# Altium PCB sense_patch.PcbDoc
Units mm, origin at the board's own origin, x right, y up, seen from the top; angles counter-clockwise.
Board outline 23.2 x 22.2 mm, 2 copper layers (Top Layer, Bottom Layer); 21 components, 15 nets, 83 pads, 145 vias.
Unrouted connection lines stored in the file: 17.
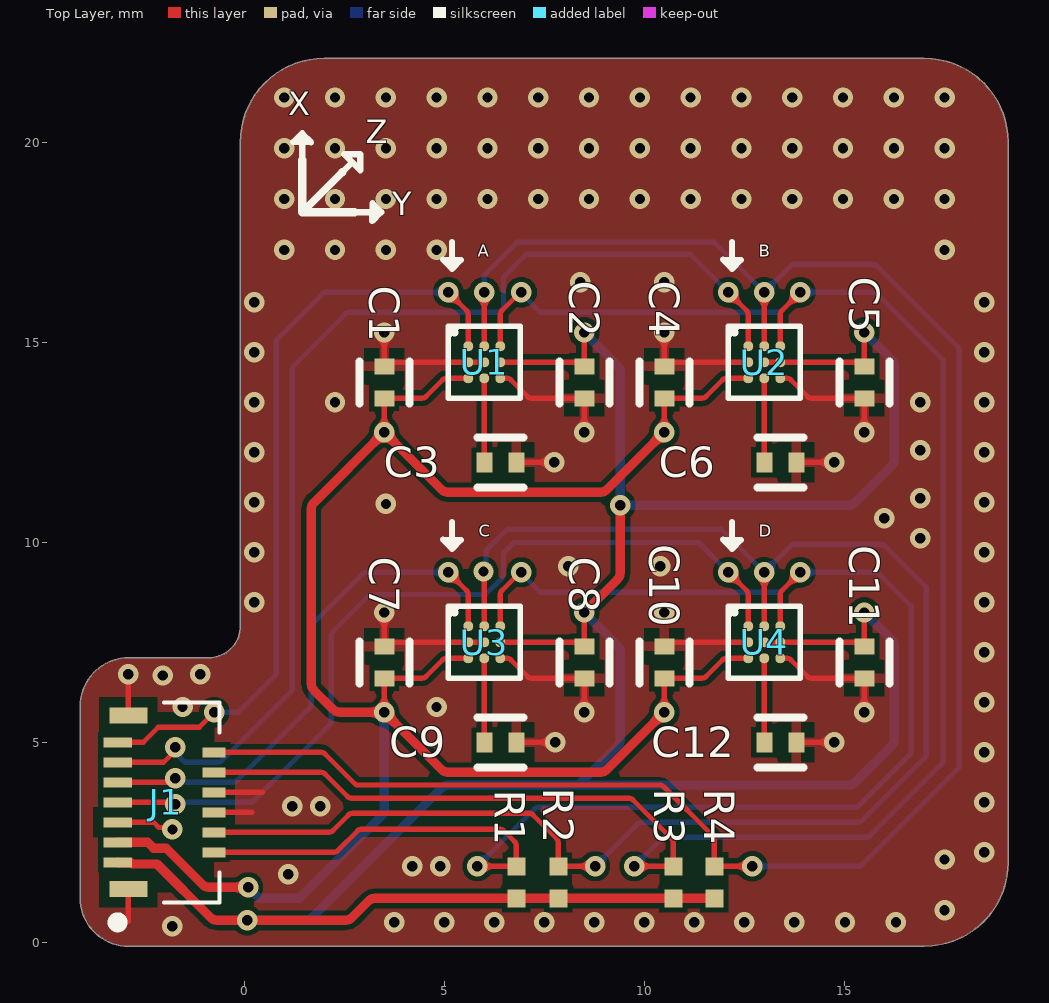
[diagram p0: Top Layer view]
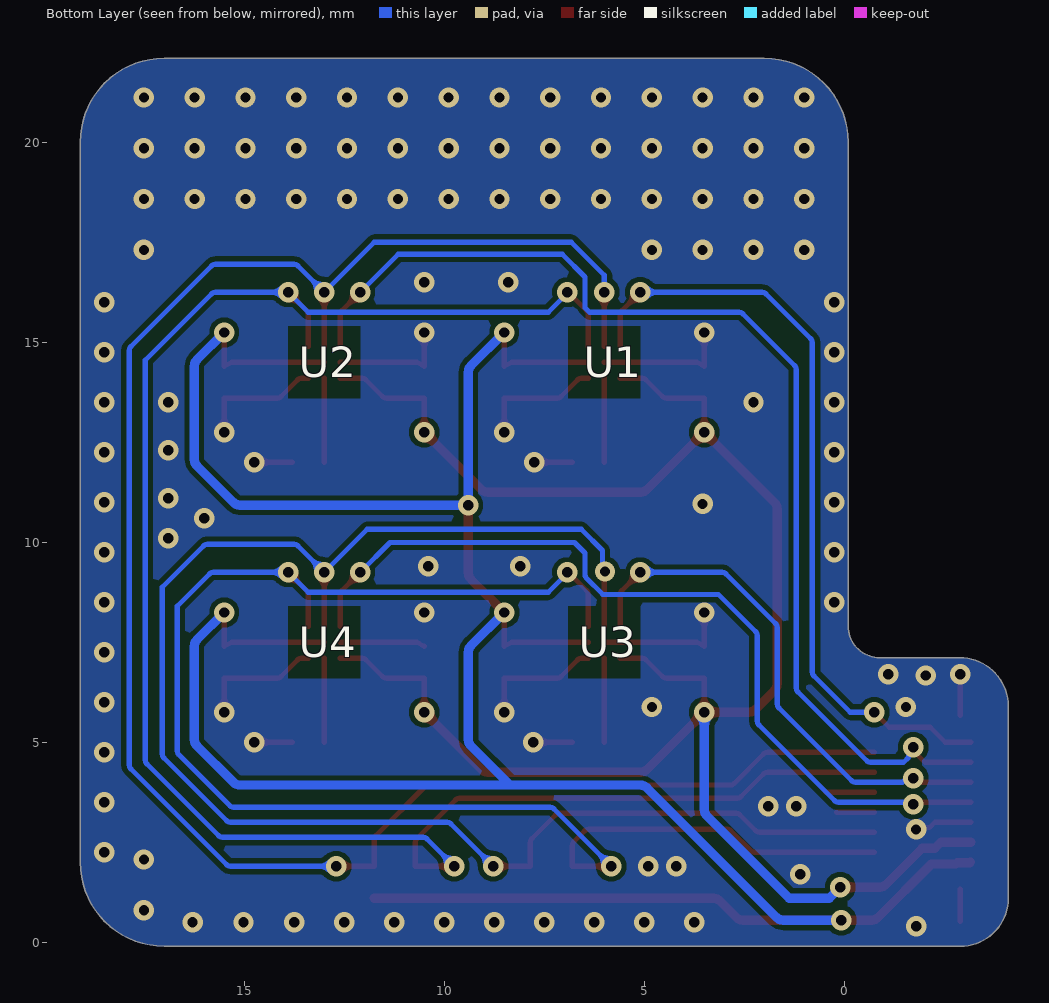
[diagram p1: Bottom Layer view, seen from below]
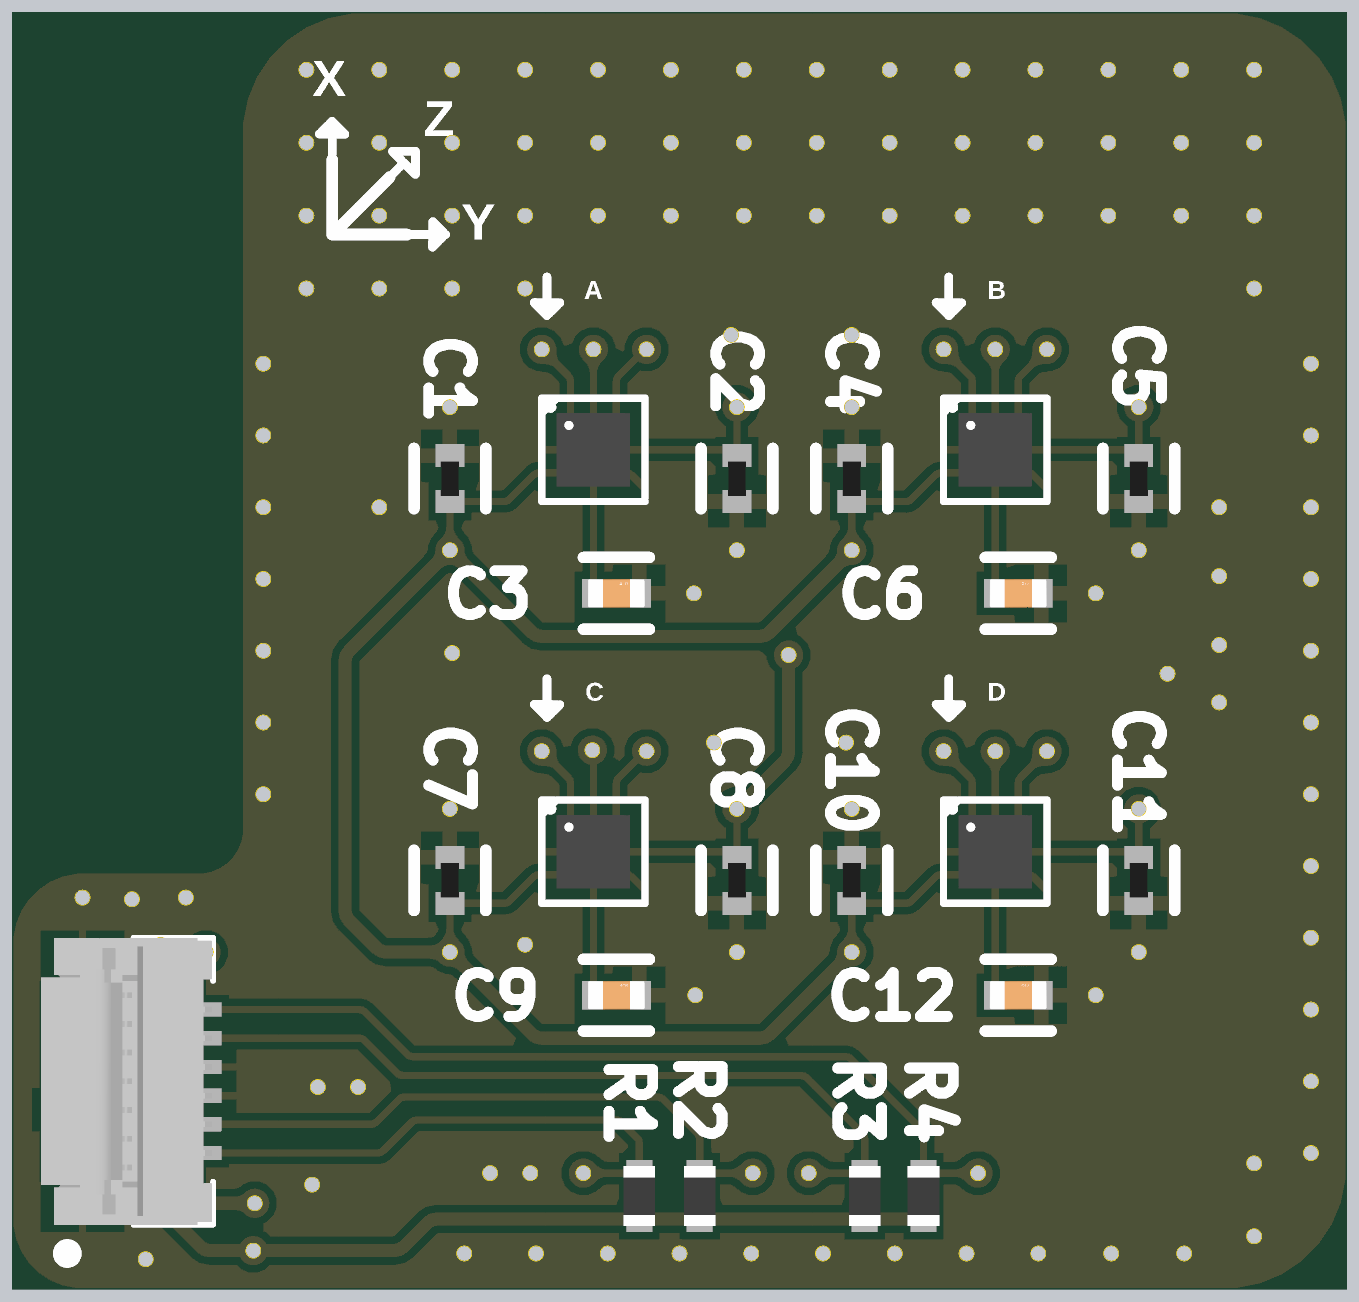
[diagram p2: 3D render of the assembled board from above, using the file's embedded part models]

## Layer stack, top to bottom
Top Solder: solder mask 0.0102, Solder Resist, Dk 3.5
Top Layer: signal copper 0.0356
Dielectric 1: dielectric 0.32, FR-4, Dk 4.8
Bottom Layer: signal copper 0.0356
Bottom Solder: solder mask 0.0102, Solder Resist, Dk 3.5

## Board outline
-2.9,-0.1 17,-0.1 17.001,-0.1 ccw(c17,2) 19.1,1.999 19.1,2 19.1,20 19.1,20.002 ccw(c17,20) 17.001,22.1 17,22.1 2,22.1 1.998,22.1 ccw(c2,20) -0.1,20 -0.1,7.9 cw(c-0.884,7.9) -0.884,7.116 -2.884,7.116 ccw(c-2.884,5.9) -4.1,5.9 -4.1,1.1 ccw(c-2.9,1.1)

## Design rules (kind name [scope] priority, off if disabled: settings)
Clearance [All] p1: gap=0.127 ignorepadtopadclearanceinfootprint=FALSE
PolygonConnect [All] p1: thpad.connectstyle=Relief thpad.reliefconductorwidth=0.254 thpad.reliefentries=4 thpad.polygonreliefangle="90 Angle" thpad.airgapwidth=0.254 smdpad.connectstyle=Relief smdpad.reliefconductorwidth=0.254 smdpad.reliefentries=4 smdpad.polygonreliefangle="90 Angle" smdpad.airgapwidth=0.254 via.connectstyle=Direct via.reliefconductorwidth=0.254 via.reliefentries=4 via.polygonreliefangle="90 Angle" via.airgapwidth=0.254
RoutingVias [All] p1: holewidth=0.254 width=1.27 viastyle="Through Hole" minholewidth=0.254 minwidth=0.508 maxholewidth=0.711 maxwidth=1.27
SolderMaskExpansion [IsVia] p1: expansion=0.102 istentingtop=TRUE
Width [All] p1: maxlimit=0.635 minlimit=0.102 preferedwidth=0.178
30 further rules are at their usual default settings.

## Classes and differential pairs
component class SENSE: C1 C2 C3 C4 C5 C6 C7 C8 C9 C10 C11 C12 U1 U2 U3 U4
component class CONNECTOR: J1 R1 R2 R3 R4

## Components (designator, comment, footprint, x,y, rotation, side; value= is the part's Value field where it differs from the comment)
C1 "0.1uF" FP-GRM15-MFG 3.5,14 r270 top value=0.10μF
C2 "0.1uF" FP-GRM15-MFG 8.5,14 r90 top value=0.10μF
C3 "2.2uF" FP-C1005-050-0_15-0_1-MFG 6.4,12 r0 top
C4 "0.1uF" FP-GRM15-MFG 10.5,14 r270 top value=0.10μF
C5 "0.1uF" FP-GRM15-MFG 15.5,14 r90 top value=0.10μF
C6 "2.2uF" FP-C1005-050-0_15-0_1-MFG 13.4,12 r0 top
C7 "0.1uF" FP-GRM15-MFG 3.5,7 r270 top value=0.10μF
C8 "0.1uF" FP-GRM15-MFG 8.5,7 r90 top value=0.10μF
C9 "2.2uF" FP-C1005-050-0_15-0_1-MFG 6.4,5 r0 top
C10 "0.1uF" FP-GRM15-MFG 10.5,7 r270 top value=0.10μF
C11 "0.1uF" FP-GRM15-MFG 15.5,7 r90 top value=0.10μF
C12 "2.2uF" FP-C1005-050-0_15-0_1-MFG 13.4,5 r0 top
J1 "502078-1362" 5020781362 -2,3.5 r270 top
R1 "4.7K" RESC1005X40X25LL05T05 6.8,1.5 r270 top
R2 "4.7K" RESC1005X40X25LL05T05 7.85,1.5 r270 top
R3 "4.7K" RESC1005X40X25LL05T05 10.725,1.5 r270 top
R4 "4.7K" RESC1005X40X25LL05T05 11.75,1.5 r270 top
U1 "BMM350" BMM350 6,14.5 r0 top
U2 "BMM350" BMM350 13,14.5 r0 top
U3 "BMM350" BMM350 6,7.5 r0 top
U4 "BMM350" BMM350 13,7.5 r0 top

## Footprints (in the part's own frame and the unit in brackets; to place one, negate y for a bottom-side part, rotate by r counter-clockwise, add the part's x,y. Pads: shape width x height; smd on the part's side, far side on the other; paste and mask are expansions set on the pad)
5020781362 [mm]
  rect 0.25x0.72 smd: 1(1.5,-1.165) 3(1,-1.165) 5(0.5,-1.165) 7(0,-1.165) 9(-0.5,-1.165) 11(-1,-1.165) 13(-1.5,-1.165)
  rect 0.25x0.57 smd: 2(1.25,1.24) 4(0.75,1.24) 6(0.25,1.24) 8(-0.25,1.24) 10(-0.75,1.24) 12(-1.25,1.24)
  rect 0.4x0.95 smd: MP1(2.17,-0.9) MP2(-2.17,-0.9)
  silkscreen extent -2.5,-1.21 3.05,1.38, body extent -2.5,-1.63 2.5,1.36, height 1
BMM350 [mm] "BGA, 9-Leads, Body 1.28x1.28mmx0.50mm, Pitch 0.40mm"
  round 0.25 smd mask+0.05: A1(-0.4,0.4) A2(0,0.4) A3(0.4,0.4) B1(-0.4,0) B2(0,0) B3(0.4,0) C1(-0.4,-0.4) C2(0,-0.4) C3(0.4,-0.4)
  silkscreen extent -0.79,0.7 -0.69,0.79, body extent -0.64,-0.64 0.64,0.64, height 0.5
FP-C1005-050-0_15-0_1-MFG [mm]
  rect 0.4x0.5 smd paste+0 mask+0: 1(-0.4,0) 2(0.4,0)
  silkscreen extent -0.58,-0.63 0.58,0.63, body extent -0.7,-0.4 0.7,0.4, height 0.25
FP-GRM15-MFG [mm]
  rect 0.4x0.5 smd paste+0 mask+0: 1(-0.4,0) 2(0.4,0)
  silkscreen extent -0.53,-0.63 0.53,0.63, body extent -0.7,-0.38 0.7,0.38, height 0.25
RESC1005X40X25LL05T05 [mm] "Chip Resistor, 2-Leads, Body 1.05x0.55mm, IPC High Density"
  rect 0.45x0.45 smd: 1(-0.4,0) 2(0.4,0)
  body extent -0.53,-0.28 0.53,0.28, height 0.4

## Part data
C1 C2 C4 C5 C7 C8 C10 C11: library part CMP-2100-03641-2, "CAP CER 0.1UF 16V X7R 0402", Capacitance=0.10μF, Manufacturer=Murata, Manufacturer Part Number=GRM155R71C104KA88D, Package=GRM15, Temperature="-55°C to +125°C", Temperature Characteristic=X7R, Temperature Range High=+125°C, Temperature Range Low=-55°C, Tolerance=10%, Voltage Rating=16Vdc, Category=Cap, ComponentLink2Description=Datasheet, ComponentLink2URL=https://search.murata.co.jp/Ceramy/image/img/A01X/G101/ENG/GRM155R71H471KA01-01A.pdf, Device Class L1="Passive Components", Device Class L2=Capacitors, Device Class L3="Ceramic Capacitors", Digikey Description="CAP CER 0.1UF 16V X7R 0402", Height=0.55mm, Ipc Land Pattern Name=CAPC10050X219, Lead Free=yes, Material=Ceramic, Mouser Description="0402 0.1 uF 16V ±10 % Tolerance X7R SMT Multilayer Ceramic Capacitor", Octopart=https://octopart.com/grm155r71c104ka88d-murata-196880, RoHS=TRUE, Standoff Height=0mm
C3 C6 C9 C12: library part CMP-08246-004344-1, "CAP CER 2.2UF 10V X7S 0402", Case Code (Imperial)=0402, Case Code (Metric)=1005, Dielectric=X7S, Dielectric Material=Ceramic, Max Operating Temperature=125°C, Min Operating Temperature=-55°C, Package Quantity=1, Tolerance=10%, Voltage Rating=10V, Capacitance=2.2uF, Case/Package=0402, Depth=0.5mm, Height=0.5mm, Lead Free="Lead Free", Length=1mm, Mount="Surface Mount", Packaging="Tape and Reel", Resistor Type=Ceramic, RoHS Compliant=Yes, Series=C, Termination=SMD/SMT, Thickness=0.022inch, Voltage Rating (DC)=10V, Weight=2.3E-05oz, Width=0.02inch
J1: "Connector", Manufacturer_Name=Molex, Mouser Part Number=538-502078-1362, Datasheet Link=https://www.molex.com/pdm_docs/sd/5020781362_sd.pdf, Height=1.7mm, Manufacturer_Part_Number=502078-1362, Mouser Price/Stock=https://www.mouser.co.uk/ProductDetail/Molex/502078-1362?qs=GBLSl2Akirt8csfPYHMErA%3D%3D
R1 R2 R3 R4: library part CMP-2002-01154-4, "Chip Resistor, 4.7 KOhm, +/- 1%, 0.1 W, -55 to 155 degC, 0402 (1005 Metric), RoHS, Tape and Reel", Case Code (Imperial)=0402, Case Code (Metric)=1005, Max Operating Temperature="155 degC", Min Operating Temperature="-55 degC", Package Quantity=1, PartNumber=ERJ-2RKF4701X, Power Rating="100 mW", Resistance="4.7 KOhm", Tolerance=1%, Voltage Rating="50 V", Case\/Package=0402, ComponentLink1Description="Manufacturer URL", ComponentLink1URL=http://www.panasonic.com/, ComponentLink2Description=Datasheet, ComponentLink2URL=http://industrial.panasonic.com/cdbs/www-data/pdf/RDA0000/AOA0000C86.pdf, DatasheetVersion=04/2015, Height="0.35 mm", Length="1 mm", Mount="Surface Mount", Mounting Technology="Surface Mount", PackageDescription="2-Pin Surface Mount Device, Body 1 x 0.5 mm", PackageReference=0402, Packaging="Cut Tape", Pins=2, Radiation Hardening=No, REACH SVHC=Yes, RoHSCompliant=true, Width="0.5 mm"

## Via types
v1: diameter 0.508, hole 0.254, Top Layer to Bottom Layer, tented both sides, 144 vias
v2: diameter 0.508, hole 0.254, Top Layer to Bottom Layer, 1 vias

## Nets (pads, with @x,y where several pads share a name; then routed paths per layer and width w, separated by ;. In a path a pad name is that pad's centre, name@x,y a point inside that pad or via, vN(x,y) a via of type N, cw(c..) or ccw(c..) an arc to the next point about the centre after c; other vN are vias at no path point)
1V8: C1.2 C4.2 C7.2 C10.2 J1.3 U1.C1 U2.C1 U3.C1 U4.C1 | length 48.8
  Top Layer w0.127: v1(3.5,5.75) C7.2 4.447,6.6 ccw(c4.447,6.727) 4.537,6.637 4.963,7.063 cw(c5.053,6.973) 5.053,7.1 U3.C1 ; v1(3.5,12.75) C1.2 4.447,13.6 ccw(c4.447,13.727) 4.537,13.637 4.963,14.063 cw(c5.053,13.973) 5.053,14.1 U1.C1 ; v1(10.5,5.75) C10.2 11.447,6.6 ccw(c11.447,6.727) 11.537,6.637 11.963,7.063 cw(c12.053,6.973) 12.053,7.1 U4.C1 ; v1(10.5,12.75) C4.2 11.447,13.6 ccw(c11.447,13.727) 11.537,13.637 11.963,14.063 cw(c12.053,13.973) 12.053,14.1 U2.C1
  Top Layer w0.229: J1.3 -2.415,2.5 -2.265,2.35 -1.95,2.35 -1.042,1.442 ccw(c-0.88,1.604) -0.88,1.375 v1(0.1,1.375) ; v1(10.5,5.75) 9.067,4.317 cw(c8.905,4.479) 8.905,4.25 5.095,4.25 cw(c5.095,4.479) 4.933,4.317 v1(3.5,5.75) 2.391,5.75 cw(c2.391,5.979) 2.23,5.817 1.742,6.305 cw(c1.904,6.466) 1.675,6.466 1.675,10.83 cw(c1.904,10.83) 1.742,10.992 v1(3.5,12.75) 4.933,11.317 ccw(c5.095,11.479) 5.095,11.25 8.905,11.25 ccw(c8.905,11.479) 9.067,11.317 v1(10.5,12.75)
  Bottom Layer w0.229: v1(0.1,1.375) 0.375,1.1 1.375,1.1 3.433,3.158 ccw(c3.271,3.32) 3.5,3.32 v1(3.5,5.75)
3V3: C2.2 C5.2 C8.2 C11.2 J1.1 R1.2 R2.2 R3.2 R4.2 U1.B3 U2.B2 U2.B3 U3.B3 U4.B2 U4.B3 | length 73.6
  Top Layer w0.127: U3.B3 8.314,7.5 C8.2 v1(8.5,8.245) ; U1.B3 8.314,14.5 C2.2 v1(8.5,15.245) ; U4.B2 U4.B3 15.313,7.5 C11.2 v1(15.5,8.245) ; U2.B2 U2.B3 15.313,14.5 C5.2 v1(15.5,15.245)
  Top Layer w0.229: J1.1@-3.159,2.006 -3.141,1.989 -2.831,1.989 -2.798,1.956 -2.181,1.956 -0.842,0.617 ccw(c-0.68,0.779) -0.68,0.55 v1(0.075,0.55) 2.53,0.55 ccw(c2.53,0.779) 2.692,0.617 3.108,1.033 cw(c3.27,0.871) 3.27,1.1 R4.2 ; v1(8.5,8.245) 9.333,9.078 ccw(c9.171,9.24) 9.4,9.24 v1(9.4,10.925)
  Bottom Layer w0.229: v1(0.075,0.55) 1.527,0.55 ccw(c1.527,0.779) 1.688,0.617 4.933,3.862 cw(c5.095,3.7) 5.095,3.929 8.354,3.929 ; v1(8.5,8.245) 9.333,7.412 cw(c9.171,7.25) 9.4,7.25 9.4,5.07 cw(c9.171,5.07) 9.333,4.908 8.354,3.929 ; v1(8.5,15.245) 9.333,14.412 cw(c9.171,14.25) 9.4,14.25 v1(9.4,10.925) 15.102,10.925 ccw(c15.102,11.154) 15.264,10.992 16.183,11.911 ccw(c16.021,12.073) 16.25,12.073 16.25,14.4 ccw(c16.021,14.4) 16.183,14.562 v1(15.5,15.245) ; v1(15.5,8.245) 16.183,7.562 cw(c16.021,7.4) 16.25,7.4 16.25,5.073 cw(c16.021,5.073) 16.183,4.911 15.267,3.995 cw(c15.106,4.157) 15.106,3.929 8.354,3.929
A_INT: J1.13 U1.A1 | length 19.4
  Top Layer w0.127: J1.13 -2.525,5 -2.15,5.375 -1.125,5.375 v1(-0.75,5.75) ; v1(5.1,16.25) 5.563,15.787 cw(c5.473,15.697) 5.6,15.697 U1.A1
  Bottom Layer w0.127: v1(-0.75,5.75) -0.15,5.75 0.763,6.663 ccw(c0.673,6.753) 0.8,6.753 0.8,14.997 cw(c0.927,14.997) 0.837,15.087 1.963,16.213 cw(c2.053,16.123) 2.053,16.25 v1(5.1,16.25)
B_INT: J1.11 U2.A1 | length 28.1
  Top Layer w0.127: J1.11 -2.015,4.5 -1.725,4.79 v1(-1.725,4.875) ; v1(12.1,16.25) 12.563,15.787 cw(c12.473,15.697) 12.6,15.697 U2.A1
  Bottom Layer w0.127: v1(-1.725,4.875) -1.725,4.772 -1.605,4.652 -1.605,4.62 -1.485,4.5 -0.653,4.5 ccw(c-0.653,4.627) -0.564,4.537 1.163,6.264 ccw(c1.073,6.353) 1.2,6.353 1.2,14.322 cw(c1.327,14.322) 1.237,14.412 2.538,15.713 cw(c2.628,15.623) 2.628,15.75 6.367,15.75 6.481,15.864 6.481,16.631 7.05,17.2 11.15,17.2 v1(12.1,16.25)
C_INT: J1.9 U3.A1 | length 13.2
  Top Layer w0.127: J1.9 -1.928,4 -1.828,4.1 v1(-1.725,4.1) ; v1(5.1,9.25) 5.563,8.787 cw(c5.473,8.697) 5.6,8.697 U3.A1
  Bottom Layer w0.127: v1(-1.725,4.1) -1.652,4.027 -1.487,4.027 -1.46,4 -0.278,4 ccw(c-0.278,4.127) -0.188,4.037 1.638,5.863 ccw(c1.548,5.953) 1.675,5.953 1.675,7.872 cw(c1.802,7.872) 1.712,7.962 2.963,9.213 cw(c3.053,9.123) 3.053,9.25 v1(5.1,9.25)
D_INT: J1.7 U4.A1 | length 21.5
  Top Layer w0.127: J1.7 -1.773,3.5 v1(-1.725,3.452) ; v1(12.1,9.25) 12.563,8.787 cw(c12.473,8.697) 12.6,8.697 U4.A1
  Bottom Layer w0.127: v1(-1.725,3.452) -1.677,3.5 0.147,3.5 ccw(c0.147,3.627) 0.237,3.537 2.138,5.438 ccw(c2.048,5.528) 2.175,5.528 2.175,7.672 cw(c2.302,7.672) 2.212,7.762 3.147,8.697 6.04,8.697 6.444,9.101 ccw(c6.354,9.191) 6.481,9.191 6.481,9.731 6.746,9.996 11.354,9.996 v1(12.1,9.25)
GND: C1.1 C2.1 C3.2 C4.1 C5.1 C6.2 C7.1 C8.1 C9.2 C10.1 C11.1 C12.2 J1.5 J1.6 J1.8 J1.MP1 J1.MP2 U1.B1 U1.B2 U1.C3 U2.B1 U2.C3 U3.B1 U3.B2 U3.C3 U4.B1 U4.C3 | length 33.7
  Top Layer w0.127: J1.5 -2.265,3 -2.129,2.864 -1.84,2.864 v1(-1.798,2.821) ; -2.9,0.525 J1.MP1 ; J1.MP2 v1(-2.9,6.7) ; J1.6 0.193,3.25 ; J1.8 0.45,3.75 ; v1(3.5,8.245) C7.1 3.687,7.5 U3.B2 ; v1(3.5,15.245) C1.1 3.687,14.5 U1.B2 ; U3.C3 6.572,7.1 cw(c6.572,6.973) 6.662,7.063 7.088,6.637 ccw(c7.178,6.727) 7.178,6.6 C8.1 v1(8.5,5.75) ; U1.C3 6.572,14.1 cw(c6.572,13.973) 6.662,14.063 7.088,13.637 ccw(c7.178,13.727) 7.178,13.6 C2.1 v1(8.5,12.75) ; C9.2 v1(7.775,5) ; C3.2 v1(7.75,12) ; C10.1 10.686,7.5 U4.B1 ; v1(10.5,15.245) C4.1 10.686,14.5 U2.B1 ; U4.C3 13.572,7.1 cw(c13.572,6.973) 13.662,7.063 14.088,6.637 ccw(c14.178,6.727) 14.178,6.6 C11.1 v1(15.5,5.75) ; U2.C3 13.572,14.1 cw(c13.572,13.973) 13.662,14.063 14.088,13.637 ccw(c14.178,13.727) 14.178,13.6 C5.1 v1(15.5,12.75) ; C12.2 v1(14.75,5) ; C6.2 v1(14.75,12)
  other v1: -1.8,0.4 3.75,0.5 5,0.5 6.25,0.5 7.5,0.5 8.75,0.5 10,0.5 11.25,0.5 12.5,0.5 13.75,0.5 15.02,0.5 16.29,0.5 17.51,0.8 1.1,1.7 4.2,1.9 4.9,1.9 17.51,2.07 18.5,2.25 1.2,3.4 1.9,3.4 18.5,3.5 18.5,4.75 -1.54,5.88 4.81,5.88 18.5,6 -2.039,6.671 -1.1,6.7 18.5,7.25 10.5,8.245 0.25,8.5 18.5,8.5 8.1,9.4 10.4,9.4 0.25,9.75 18.5,9.75 16.9,10.1 16,10.6 3.54,10.96 0.25,11 18.5,11 16.9,11.1 0.25,12.25 18.5,12.25 16.9,12.3 0.25,13.5 2.27,13.5 16.9,13.5 18.5,13.5 0.25,14.75 18.5,14.75 0.25,16 18.5,16 8.4,16.5 10.5,16.5 1,17.31 2.27,17.31 3.54,17.31 4.81,17.31 17.51,17.31 1,18.58 2.27,18.58 3.54,18.58 4.81,18.58 6.08,18.58 7.35,18.58 8.62,18.58 9.89,18.58 11.16,18.58 12.43,18.58 13.7,18.58 14.97,18.58 16.24,18.58 17.51,18.58 1,19.85 2.27,19.85 3.54,19.85 4.81,19.85 6.08,19.85 7.35,19.85 8.62,19.85 9.89,19.85 11.16,19.85 12.43,19.85 13.7,19.85 14.97,19.85 16.24,19.85 17.51,19.85 1,21.12 2.27,21.12 3.54,21.12 6.08,21.12 7.35,21.12 8.62,21.12 9.89,21.12 11.16,21.12 12.43,21.12 13.7,21.12 14.97,21.12 16.24,21.12 17.51,21.12
  other v2: 4.81,21.12
I2C_CH1_SCK: J1.10 R3.1 U1.A3 U2.A3 | length 47.4
  Top Layer w0.127: J1.10 1.922,4.25 cw(c1.922,4.123) 2.013,4.212 2.588,3.637 ccw(c2.678,3.727) 2.678,3.6 9.622,3.6 cw(c9.622,3.473) 9.712,3.563 10.688,2.587 cw(c10.598,2.497) 10.725,2.497 10.725,2.061 R3.1 v1(9.75,1.9) ; U1.A3 6.4,15.697 cw(c6.527,15.697) 6.437,15.787 6.9,16.25 v1(6.925,16.25) ; U2.A3 13.4,15.697 cw(c13.527,15.697) 13.437,15.787 v1(13.9,16.25)
  Bottom Layer w0.127: v1(6.925,16.25) 6.925,16.225 7.4,15.75 13.4,15.75 v1(13.9,16.25) 15.722,16.25 cw(c15.722,16.123) 15.812,16.213 17.475,14.55 17.475,4.553 cw(c17.348,4.553) 17.438,4.463 15.637,2.662 cw(c15.547,2.752) 15.547,2.625 10.528,2.625 ccw(c10.528,2.498) 10.438,2.588 v1(9.75,1.9)
I2C_CH1_SDA: J1.12 R4.1 U1.A2 U2.A2 | length 48.7
  Top Layer w0.127: J1.12 1.922,4.75 cw(c1.922,4.623) 2.013,4.712 2.759,3.966 ccw(c2.849,4.056) 2.849,3.929 10.394,3.929 cw(c10.394,3.802) 10.483,3.892 11.713,2.662 cw(c11.623,2.572) 11.75,2.572 11.75,2.061 R4.1 v1(12.7,1.9) ; U1.A2 v1(6,16.25) ; U2.A2 v1(13,16.25)
  Bottom Layer w0.127: v1(6,16.25) 6,16.675 6.825,17.5 11.75,17.5 v1(13,16.25) 13.663,16.913 cw(c13.753,16.823) 13.753,16.95 15.722,16.95 cw(c15.722,16.823) 15.812,16.913 17.838,14.887 cw(c17.748,14.797) 17.875,14.797 17.875,4.427 cw(c17.748,4.427) 17.838,4.337 15.438,1.937 cw(c15.348,2.027) 15.348,1.9 v1(12.7,1.9)
I2C_CH2_SCK: J1.2 R1.1 U3.A3 U4.A3 | length 38.8
  Top Layer w0.127: J1.2 2.244,2.25 ccw(c2.244,2.377) 2.333,2.287 2.835,2.788 cw(c2.924,2.698) 2.924,2.825 6.397,2.825 cw(c6.397,2.698) 6.487,2.788 6.763,2.512 cw(c6.673,2.422) 6.8,2.422 6.8,2.061 R1.1 v1(5.825,1.9) ; U3.A3 6.4,8.697 cw(c6.527,8.697) 6.437,8.787 6.9,9.25 v1(6.925,9.25) ; U4.A3 13.4,8.697 cw(c13.527,8.697) 13.437,8.787 v1(13.9,9.25)
  Bottom Layer w0.127: v1(5.825,1.9) 7.263,3.338 cw(c7.353,3.248) 7.353,3.375 15.27,3.375 ccw(c15.27,3.502) 15.359,3.412 16.638,4.691 ccw(c16.548,4.78) 16.675,4.78 16.675,8.4 15.862,9.213 ccw(c15.772,9.123) 15.772,9.25 v1(13.9,9.25) 13.4,8.75 7.4,8.75 6.925,9.225 v1(6.925,9.25)
I2C_CH2_SDA: J1.4 R2.1 U3.A2 U4.A2 | length 39.9
  Top Layer w0.127: J1.4 2.122,2.75 ccw(c2.122,2.877) 2.212,2.787 2.613,3.188 cw(c2.703,3.098) 2.703,3.225 7.122,3.225 cw(c7.122,3.098) 7.212,3.188 7.813,2.587 cw(c7.723,2.497) 7.85,2.497 7.85,2.061 R2.1 v1(8.775,1.9) ; v1(5.982,9.268) 6,9.25 U3.A2 ; U4.A2 v1(13,9.25)
  Bottom Layer w0.127: v1(5.982,9.268) 6.042,9.328 6.042,9.792 6.575,10.325 11.925,10.325 v1(13,9.25) 13.663,9.913 cw(c13.753,9.823) 13.753,9.95 15.922,9.95 cw(c15.922,9.823) 16.012,9.913 17.05,8.875 17.05,4.703 cw(c16.923,4.703) 17.013,4.613 15.437,3.037 cw(c15.347,3.127) 15.347,3 9.928,3 ccw(c9.928,2.873) 9.838,2.963 v1(8.775,1.9)
NetC3_1: C3.1 U1.C2 | length 2.1
  Top Layer w0.127: C3.1 6,12.186 U1.C2
NetC6_1: C6.1 U2.C2 | length 2.1
  Top Layer w0.127: C6.1 U2.C2
NetC9_1: C9.1 U3.C2 | length 2.1
  Top Layer w0.127: C9.1 6,5.186 U3.C2
NetC12_1: C12.1 U4.C2 | length 2.1
  Top Layer w0.127: C12.1 13,5.186 U4.C2

## Polygon pours and split planes (outlines as drawn)
GND on Top Layer "TOP GND" (solid, pour order 0): -2.9,-0.1 17,-0.1 17.001,-0.1 ccw(c17,2) 19.1,1.999 19.1,2 19.1,20 19.1,20.002 ccw(c17,20) 17.001,22.1 17,22.1 2,22.1 1.998,22.1 ccw(c2,20) -0.1,20 -0.1,7.9 cw(c-0.884,7.9) -0.884,7.116 -2.884,7.116 ccw(c-2.884,5.9) -4.1,5.9 -4.1,1.1 ccw(c-2.9,1.1)
GND on Bottom Layer "BOT GND" (solid, pour order 1): -2.9,-0.1 17,-0.1 17.001,-0.1 ccw(c17,2) 19.1,1.999 19.1,2 19.1,20 19.1,20.002 ccw(c17,20) 17.001,22.1 17,22.1 2,22.1 1.998,22.1 ccw(c2,20) -0.1,20 -0.1,7.9 cw(c-0.884,7.9) -0.884,7.116 -2.884,7.116 ccw(c-2.884,5.9) -4.1,5.9 -4.1,1.1 ccw(c-2.9,1.1)

## Other copper
Top Layer:
  pour cut-out: -0.75,5.75 -3.25,5.75 -3.25,1.25 -0.75,1.25
Multi-Layer:
  pour cut-out: 6.9,15.4 5.1,15.4 5.1,13.6 6.9,13.6
  pour cut-out: 13.9,15.4 12.1,15.4 12.1,13.6 13.9,13.6
  pour cut-out: 13.9,8.4 12.1,8.4 12.1,6.6 13.9,6.6
  pour cut-out: 6.9,8.4 5.1,8.4 5.1,6.6 6.9,6.6

## Silkscreen, mask and mechanical layers (free items; w line width, h text height)
Top Overlay:
  lines w0.127: 5.1,8.14 5.36,8.4 6.9,8.4 ; 5.1,15.14 5.36,15.4 6.9,15.4 ; 5.205,8.245 5.1,8.35 5.1,8.4 ; 5.205,15.245 5.1,15.35 5.1,15.4 ; 12.1,8.14 12.36,8.4 13.9,8.4 ; 12.1,15.14 12.36,15.4 13.9,15.4 ; 12.205,8.245 12.1,8.35 12.1,8.4 ; 12.205,15.245 12.1,15.35 12.1,15.4 ; 5.1,8.4 6.9,8.4 ; 5.1,8.4 5.1,6.6 6.9,6.6 6.9,8.4 ; 5.1,15.4 5.1,13.6 6.9,13.6 6.9,15.4 ; 5.1,15.4 6.9,15.4 ; 12.1,8.4 13.9,8.4 ; 12.1,8.4 12.1,6.6 13.9,6.6 13.9,8.4 ; 12.1,15.4 13.9,15.4 ; 12.1,15.4 12.1,13.6 13.9,13.6 13.9,15.4
  lines w0.152: 1.446,20.223 1.225,20.002 1.671,19.998 1.45,20.218 ; 1.45,19.552 1.45,20.225 ; 2.45,19.25 2.7,19.5 ; 2.752,18.25 3.425,18.25 ccw(c3.418,18.25) 3.423,18.254 3.202,18.475 3.198,18.029 3.418,18.25 ; 5.19,9.844 4.97,10.065 5.415,10.06 5.195,9.84 cw(c5.19,9.844) 5.19,9.838 5.19,10.51 ; 5.19,16.844 4.97,17.065 5.415,17.06 5.195,16.84 cw(c5.19,16.844) 5.19,16.838 5.19,17.51 ; 12.19,9.844 11.97,10.065 12.415,10.06 12.195,9.84 cw(c12.19,9.844) 12.19,9.838 12.19,10.51 ; 12.19,16.844 11.97,17.065 12.415,17.06 12.195,16.84 cw(c12.19,16.844) 12.19,16.838 12.19,17.51 ; 2.5,19.7 2.9,19.7 2.9,19.3 2.7,19.5 ; 2.5,19.7 2.7,19.5 ; 2.5,19.7 2.7,19.5
  lines w0.203: 1.45,19.552 1.45,18.25 ; 2.45,19.25 1.45,18.25 ; 2.752,18.25 1.45,18.25
  text "X" at 1.103,20.48 h1
  text "Z" at 3.04,19.78 h1
  text "Y" at 3.701,17.98 h1
  text "A" at 5.837,17.037 h0.51
  text "B" at 12.864,17.037 h0.51
  text "C" at 5.858,10.037 h0.51
  text "D" at 12.863,10.037 h0.51
Mechanical 1:
  lines w0.203: -4.1,1.1 ccw(c-2.9,1.1) -2.9,-0.1 17,-0.1 17.001,-0.1 ccw(c17,2) 19.1,1.999 19.1,2 19.1,20 19.1,20.002 ccw(c17,20) 17.001,22.1 17,22.1 2,22.1 1.998,22.1 ccw(c2,20) -0.1,20 -0.1,7.9 cw(c-0.884,7.9) -0.884,7.116 -2.884,7.116 ccw(c-2.884,5.9) -4.1,5.9 -4.1,1.1